# Altium PCB ESP32_GRBL_LASER.PcbDoc
Units mm, origin at the board's own origin, x right, y up, seen from the top; angles counter-clockwise.
Board outline 62.95 x 80 mm, 2 copper layers (Top Layer, Bottom Layer); 43 components, 52 nets, 206 pads, 90 vias.
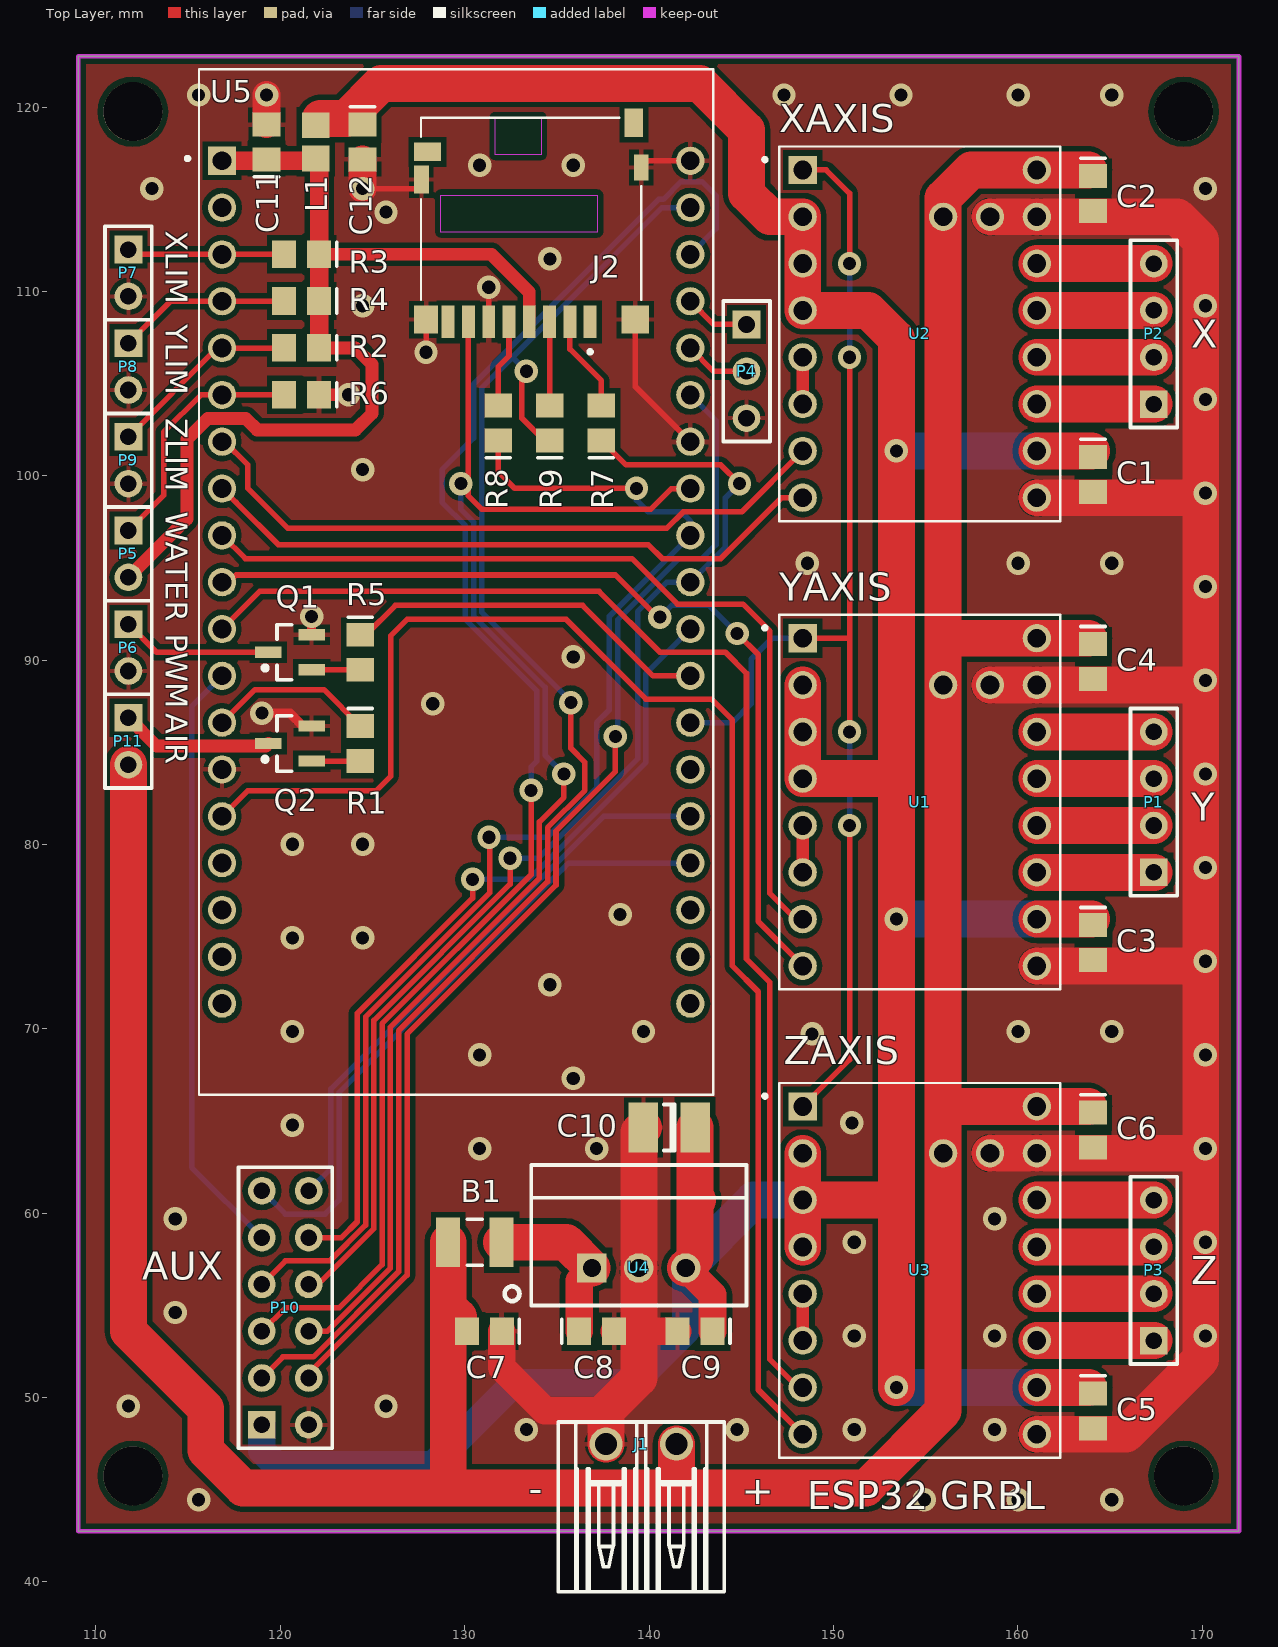
[diagram p0: Top Layer view]
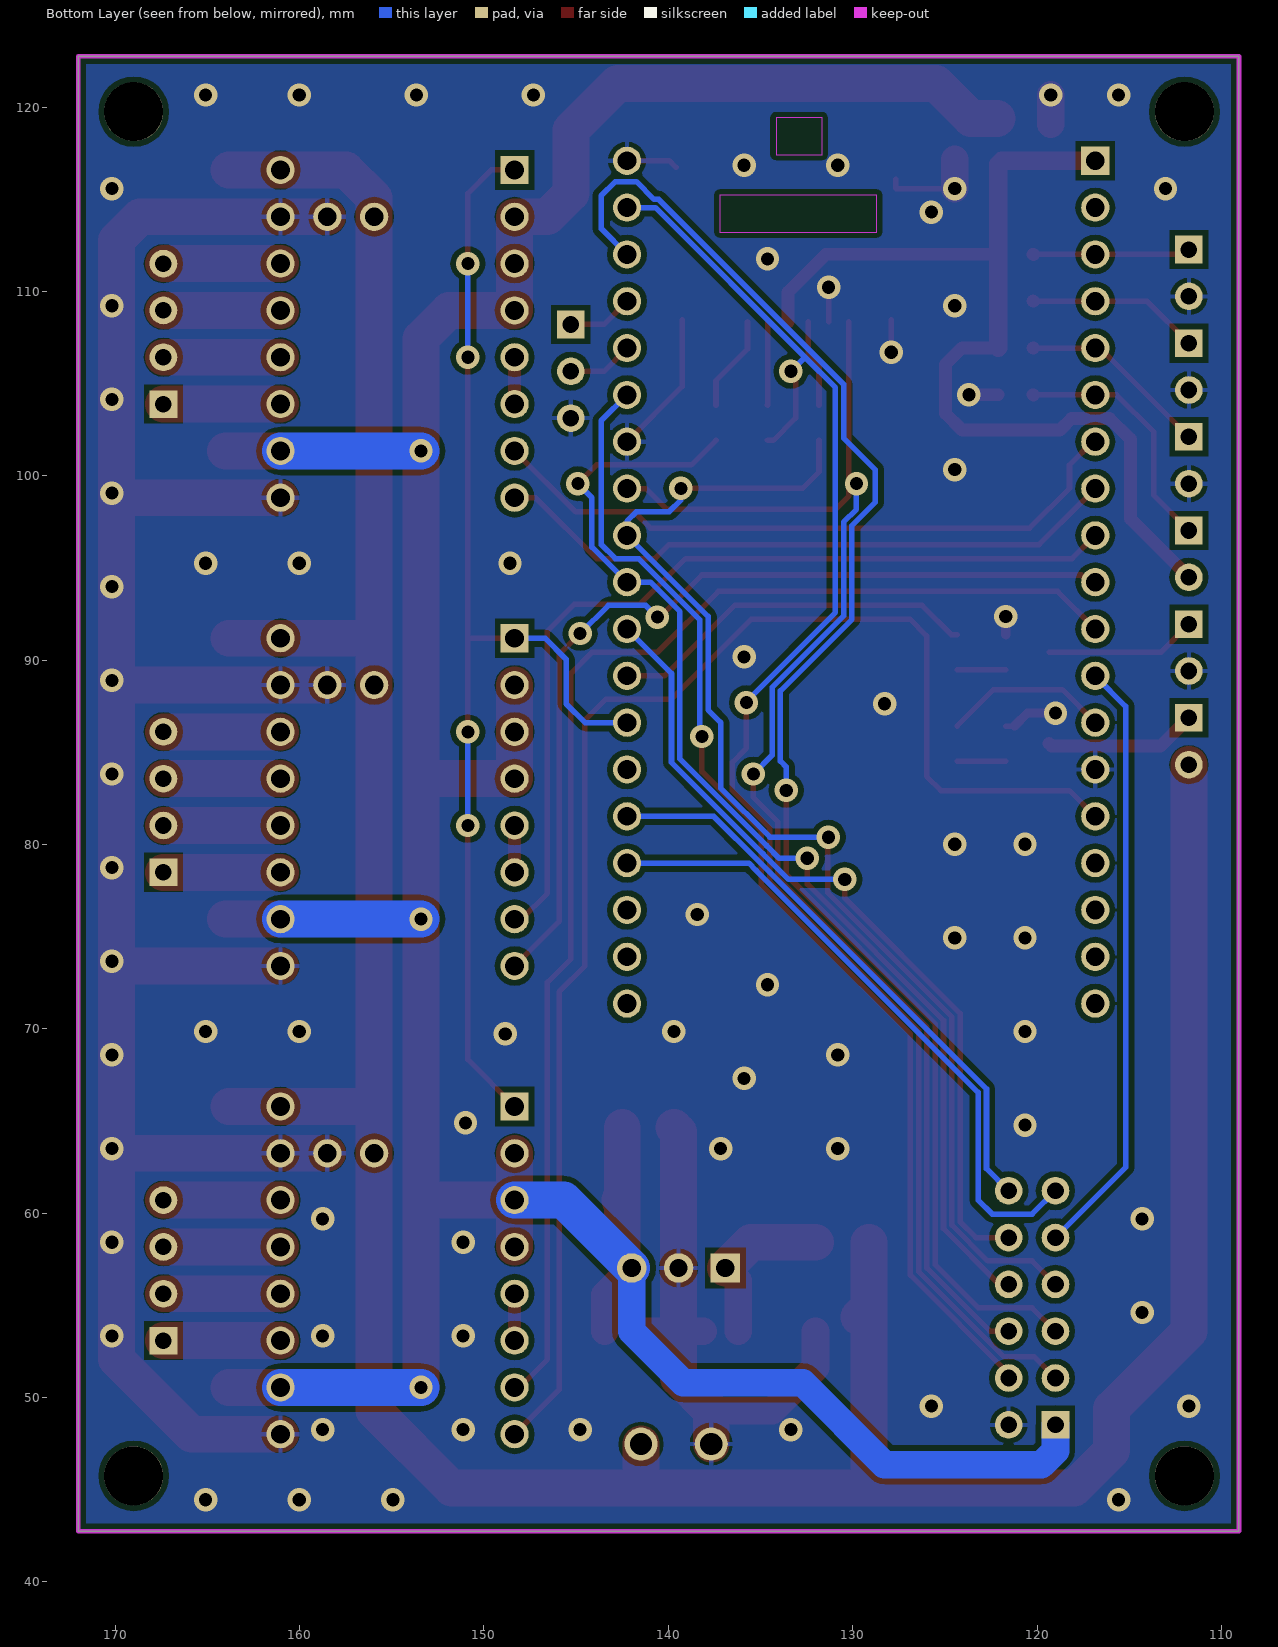
[diagram p1: Bottom Layer view, seen from below]

## Layer stack, top to bottom
Top Solder: solder mask 0.0102, Solder Resist, Dk 3.5
Top Layer: signal copper 0.0356
Dielectric 1: dielectric 0.32, FR-4, Dk 4.8
Bottom Layer: signal copper 0.0356
Bottom Solder: solder mask 0.0102, Solder Resist, Dk 3.5

## Board outline
109.046,42.746 172,42.746 172,122.746 109.046,122.746

## Design rules (kind name [scope] priority, off if disabled: settings)
Clearance Clearance_1 [All vs InPolygon] p1: gap=0.3
Clearance [All] p2: gap=0.15
ComponentClearance [All] p1 off: gap=0.254 collisioncheckmode=3 verticalgap=0.254 showdistances=FALSE
Height [All] p1: minheight=0 maxheight=50 prefheight=12.7
HoleSize [All] p1: absolutevalues=TRUE maxlimit=4.2 minlimit=0.025 maxpercent=80.000 minpercent=20.000
PolygonConnect [ispad] p1: connectstyle=Relief reliefconductorwidth=0.254 reliefentries=4 polygonreliefangle="90 Angle" airgapwidth=0.254
PolygonConnect PolygonConnect_1 [All] p2: connectstyle=Direct reliefconductorwidth=0.254 reliefentries=4 polygonreliefangle="90 Angle" airgapwidth=0.254
RoutingVias [All] p1: holewidth=0.3 width=0.6 viastyle="Through Hole" minholewidth=0.2 minwidth=0.5 maxholewidth=3.81 maxwidth=5.08
SilkToSolderMaskClearance SilkscreenOverComponentPads [IsPad] p1: minsilkscreentomaskgap=0.254 clearancetoexposedcopper=TRUE
SolderMaskExpansion [All] p1: expansion=0.102
UnpouredPolygon [All] p1: allowunpoured=FALSE
Width [All] p1: maxlimit=10 minlimit=0.15 preferedwidth=0.3 minimp=50.000000 maximp=50.000000 favimp=50.000000
25 further rules are at their usual default settings.

## Components (designator, comment, footprint, x,y, rotation, side; value= is the part's Value field where it differs from the comment)
B1 "Ferrite" INDC3225N 130.556,58.42 r180 top
C1 "Cap Semi" 0805 164.084,100.076 r270 top
C2 "Cap Semi" 0805 164.084,115.316 r270 top
C3 "Cap Semi" 0805 164.084,74.676 r270 top
C4 "Cap Semi" 0805 164.084,89.916 r270 top
C5 "Cap Semi" 0805 164.084,49.276 r270 top
C6 "Cap Semi" 0805 164.084,64.516 r270 top
C7 "Cap Semi" 0805 131.064,53.594 r180 top
C8 "Cap Semi" 0805 137.16,53.594 r0 top
C9 "Cap Semi" 0805 142.494,53.594 r180 top
C10 "Cap Semi" 1210 141.097,64.643 r180 top
C11 "Cap Semi" 0805 119.253,118.11 r90 top
C12 "Cap Semi" 0805 124.46,118.11 r270 top
J1 "1037490000" SC_3_81_270G_02 139.573,44.069 r0 top
J2 "1140084168" AMPHENOL_1140084168 133.604,109.22 r0 top
L1 "Ferrite" INDC2012N 121.92,118.11 r90 top
P1 "Y" HDR1X4 167.386,78.486 r90 top
P2 "X" HDR1X4 167.386,103.886 r90 top
P3 "Z" HDR1X4 167.386,53.086 r90 top
P4 "UART" HDR1X3 145.288,108.204 r270 top
P5 "WATER" HDR1X2 111.76,97.028 r270 top
P6 "PWM" HDR1X2 111.76,91.948 r270 top
P7 "XLIM" HDR1X2 111.76,112.268 r270 top
P8 "YLIM" HDR1X2 111.76,107.188 r270 top
P9 "ZLIM" HDR1X2 111.76,102.108 r270 top
P10 "AUX" HDR2X6 118.999,48.514 r90 top
P11 "AIR" HDR1X2 111.76,86.868 r270 top
Q1 "BSS123A" SOT23_M 120.523,90.424 r180 top
Q2 "BSS123A" SOT23_M 120.523,85.471 r180 top
R1 "Res2" 0805 124.333,85.471 r270 top
R2 "Res2" 0805 121.158,106.934 r180 top
R3 "Res2" 0805 121.158,112.014 r180 top
R4 "Res2" 0805 121.158,109.474 r180 top
R5 "Res2" 0805 124.333,90.424 r270 top
R6 "Res2" 0805 121.158,104.394 r180 top
R7 "Res2" 0805 137.414,102.87 r90 top
R8 "Res2" 0805 131.826,102.87 r90 top
R9 "Res2" 0805 134.62,102.87 r90 top
U1 "YAXIS" MODULE_A4988_STEPPER_MOTOR_DRIVER_CARRIER 154.686,82.296 r0 top
U2 "XAXIS" MODULE_A4988_STEPPER_MOTOR_DRIVER_CARRIER 154.686,107.696 r0 top
U3 "ZAXIS" MODULE_A4988_STEPPER_MOTOR_DRIVER_CARRIER 154.686,56.896 r0 top
U4 "3V3REG" TRS1-24xx 139.446,57.023 r0 top
U5 "ESP32-DEVKITC" MODULE_ESP32-DEVKITC 129.54,94.234 r0 top

## Footprints (in the part's own frame and the unit in brackets; to place one, negate y for a bottom-side part, rotate by r counter-clockwise, add the part's x,y. Pads: shape width x height; smd on the part's side, far side on the other; paste and mask are expansions set on the pad)
0805 [mm] "Chip Capacitor; Body 2.0 x 1.2 mm (LxW typ)"
  rect 1.3x1.5 smd: 1(-0.95,0) 2(0.95,0)
  silkscreen extent -1.9,-0.65 -1.9,0.65
1210 [mm] "Chip Capacitor; Body 3.2 x 2.5 mm (LxW typ)"
  rect 1.6x2.7 smd: 1(-1.4,0) 2(1.4,0)
  silkscreen extent -0.3,-1.25 0.3,1.25, body extent -1.37,-1.3 1.42,1.32, height 2.5
AMPHENOL_1140084168 [mm]
  rect 0.7x1.75 smd: 1(3.2,-0.875) 2(2.1,-0.875) 3(1,-0.875) 4(-0.1,-0.875) 5(-1.2,-0.875) 6(-2.3,-0.875) 7(-3.4,-0.875) 8(-4.5,-0.875)
  rect 1x1.55 smd: 9(5.575,9.925)
  rect 1.45x1 smd: 10(-5.625,8.35)
  rect 1.5x1.5 smd: S1(5.65,-0.75)
  rect 1.3x1.5 smd: S2(-5.7,-0.75)
  rect 0.8x1.4 smd: S3(5.975,7.5)
  rect 0.8x1.5 smd: S4(-5.95,6.85)
  Keep-Out Layer region: 3.6,4 -4.9,4 -4.9,6 3.6,6
  Keep-Out Layer region: 0.55,8.2 -1.95,8.2 -1.95,10.2 0.55,10.2
  Keep-Out Layer region: 0.55,8.2 -1.95,8.2 -1.95,10.2 0.55,10.2
  Keep-Out Layer region: 3.6,4 -4.9,4 -4.9,6 3.6,6
  silkscreen extent -5.97,-2.6 5.97,10.2
HDR1X2 [mm] "Connector; Header; 2 Position"
  rect 1.5x1.5 hole 0.9: 1(0,0)
  round 1.5 hole 0.9: 2(2.54,0)
  silkscreen extent -1.27,-1.27 3.81,1.27
HDR1X3 [mm] "Connector; Header; 3 Position"
  rect 1.5x1.5 hole 0.9: 1(0,0)
  round 1.5 hole 0.9: 2(2.54,0) 3(5.08,0)
  silkscreen extent -1.27,-1.27 6.35,1.27
HDR1X4 [mm] "Connector; Header; 4 Position"
  rect 1.5x1.5 hole 0.9: 1(0,0)
  round 1.5 hole 0.9: 2(2.54,0) 3(5.08,0) 4(7.62,0)
  silkscreen extent -1.27,-1.27 8.89,1.27
HDR2X6 [mm] "Connector; Header; 6x2 Position"
  rect 1.5x1.5 hole 0.9: 1(0,0)
  round 1.5 hole 0.9: 2(0,-2.54) 3(2.54,0) 4(2.54,-2.54) 5(5.08,0) 6(5.08,-2.54) 7(7.62,0) 8(7.62,-2.54) 9(10.16,0) 10(10.16,-2.54) 11(12.7,0) 12(12.7,-2.54)
  silkscreen extent -1.27,-3.81 13.97,1.27
INDC2012N [mm] "Chip Inductor, Body 2.0x1.2mm, IPC Medium Density"
  rect 1.4x1.5 smd: 1(0.9,0) 2(-0.9,0)
  body extent -1.1,-0.7 1.1,0.7, height 1.1
INDC3225N [mm] "Chip Inductor, Body 3.2x2.5mm, IPC Medium Density"
  rect 1.3x2.7 smd: 1(1.45,0) 2(-1.45,0)
  silkscreen extent -0.4,-1.25 0.4,1.25, body extent -1.35,-1.7 1.35,1.7, height 1.5
MODULE_A4988_STEPPER_MOTOR_DRIVER_CARRIER [mm]
  rect 1.53x1.53 hole 1.02: 1(-6.35,8.89)
  round 1.53 hole 1.02: 2(-6.35,6.35) 3(-6.35,3.81) 4(-6.35,1.27) 5(-6.35,-1.27) 6(-6.35,-3.81) 7(-6.35,-6.35) 8(-6.35,-8.89) 9(6.35,-8.89) 10(6.35,-6.35) 11(6.35,-3.81) 12(6.35,-1.27) 13(6.35,1.27) 14(6.35,3.81) 15(6.35,6.35) 16(6.35,8.89)
  silkscreen extent -8.5,-10.16 7.62,10.16
MODULE_ESP32-DEVKITC [mm]
  rect 1.53x1.53 hole 1.02: 1(-12.7,22.85)
  round 1.53 hole 1.02: 2(-12.7,20.31) 3(-12.7,17.77) 4(-12.7,15.23) 5(-12.7,12.69) 6(-12.7,10.15) 7(-12.7,7.61) 8(-12.7,5.07) 9(-12.7,2.53) 10(-12.7,-0.01) 11(-12.7,-2.55) 12(-12.7,-5.09) 13(-12.7,-7.63) 14(-12.7,-10.17) 15(-12.7,-12.71) 16(-12.7,-15.25) 17(-12.7,-17.79) 18(-12.7,-20.33) 19(-12.7,-22.87) 20(12.7,-22.87) 21(12.7,-20.33) 22(12.7,-17.79) 23(12.7,-15.25) 24(12.7,-12.71) 25(12.7,-10.17) 26(12.7,-7.63) 27(12.7,-5.09) 28(12.7,-2.55) 29(12.7,-0.01) 30(12.7,2.53) 31(12.7,5.07) 32(12.7,7.61) 33(12.7,10.15) 34(12.7,12.69) 35(12.7,15.23) 36(12.7,17.77) 37(12.7,20.31) 38(12.7,22.85)
  silkscreen extent -14.67,-27.81 13.95,27.81
SC_3_81_270G_02 [mm] "OMNIMATE Signal - Serie BC/SC 3.81  SC 3.81/02/270G 3.2"
  round 1.8 hole 1.2: A1(1.91,3.4) A2(-1.9,3.4)
  silkscreen extent -4.51,-4.6 4.5,4.6, body extent -4.51,-4.6 4.5,4.6, height 7.1
SOT23_M [mm] "SOT23, 3-Leads, Body 2.9x1.3mm, Pitch 0.95mm, Lead Span 2.3mm - Reverse Pinning, IPC Low Density"
  rect 1.45x0.6 smd: 1(1.175,0) 2(-1.175,-0.95) 3(-1.175,0.95)
  silkscreen extent -0.1,-1.5 1.47,1.5, body extent -0.7,-1.5 0.7,1.5, height 1.1
TRS1-24xx [mm] "Switching Regulator,18-32Vin,5Vout 1A"
  rect 1.6x1.6 hole 1: 1(-2.54,0)
  round 1.6 hole 1: 2(0,0) 3(2.54,0)
  silkscreen extent -7.28,-2.03 5.84,5.59, body extent -5.84,-2.03 5.84,5.59, height 10.2

## Part data
B1: library part Inductor, "Inductor"
C1 C2 C3 C4 C5 C6 C7 C8 C9 C10 C11 C12: "Capacitor (Semiconductor SIM Model)"
J1: "OMNIMATE Signal - series BC/SC 3.81"
J2: "10 _8 + 2_ Position Card Connector Secure Digital - microSD™ Surface Mount, Right Angle Gold"
L1: library part "Inductor Iron", "Magnetic-Core Inductor"
P1 P2 P3: library part "Header 4", "Header, 4-Pin"
P4: library part "Header 3", "Header, 3-Pin"
P5 P6 P7 P8 P9 P11: library part "Header 2", "Header, 2-Pin"
P10: library part "Header 6X2", "Header, 6-Pin, Dual row"
Q1 Q2: "N-Channel Enhancement Mode Vertical DMOS FET"
R1 R2 R3 R4 R5 R6 R7 R8 R9: "Resistor"
U1 U2 U3: library part A4988_STEPPER_MOTOR_DRIVER_CARRIER, "Stepper Motor Driver"
U4: library part TSR1-2433, "Switching Regulator,18-32Vin,3.3Vout 1A"
U5: "- Transceiver; 802.11 b/g/n _Wi-Fi, WiFi, WLAN_, Bluetooth® Smart Ready 4.x Dual Mode For Use With ESP-WROOM-32"

## Free pads (board coordinates)
  round 1.53 hole 1.02: 0(158.496,63.246) 0(158.496,88.646) 0(158.496,114.046) 1(155.956,63.246) 1(155.956,88.646) 1(155.956,114.046)
  round 3.2 hole 3.2: 0(169,45.746) 1(112,45.746) 2(112,119.746) 3(169,119.746)

## Via types
v1: diameter 1.27, hole 0.711, Top Layer to Bottom Layer, tented both sides, 90 vias

## Nets (pads, with @x,y where several pads share a name; then routed paths per layer and width w, separated by ;. In a path a pad name is that pad's centre, name@x,y a point inside that pad or via, vN(x,y) a via of type N, cw(c..) or ccw(c..) an arc to the next point about the centre after c; other vN are vias at no path point)
AIR_ASSIST: R1.1 U5.13 | length 9.1
  Top Layer w0.3: U5.13 118.628,88.392 122.362,88.392 R1.1
GND: C1.2 C2.2 C3.2 C4.2 C5.2 C6.2 C7.1 C8.2 C9.2 C10.2 C11.2 C12.2 J1.A2 J2.6 J2.S1 J2.S2 J2.S3 J2.S4 P4.3 P6.2 P7.2 P8.2 P9.2 P10.2 pad.0@158.496,63.246 pad.0@158.496,88.646 pad.0@158.496,114.046 Q1.2 Q2.2 R6.1 U1.9 U1.15 U2.9 U2.15 U3.9 U3.15 U4.2 U5.14 U5.32 U5.38 | length 181
  Top Layer w0.3: Q2.2@121.224,86.421 Q2.2 ; v1(124.46,115.57) 127.635,115.57 127.654,115.589 J2.S4 ; v1(127.904,106.695) J2.S2 ; J2.6 v1(131.304,110.222) ; J2.S1 139.254,104.83 U5.32 ; J2.S3 139.943,117.084 U5.38
  Top Layer w0.5: v1(118.999,87.122) 120.523,87.122 Q2.2@121.224,86.421 ; Q1.2 v1(121.698,92.361)
  Top Layer w0.7: R6.1 v1(123.698,104.394)
  Top Layer w1.5: C11.2 v1(119.253,120.65) ; v1(124.46,115.57) C12.2 ; C7.1 132.014,51.628 134.361,49.281 137.673,49.281 ; C8.2 139.446,53.594 139.573,53.594 ; 139.446,53.721 139.573,53.594 ; C9.2 139.573,53.594
  Top Layer w2: J1.A2 137.673,49.281 139.446,51.054 139.446,53.594 139.446,53.721 U4.2 139.446,64.392 C10.2 ; pad.0@158.496,63.246 U3.15 v1@169.926,63.246 ; pad.0@158.496,88.646 U1.15 v1@169.926,88.646 ; pad.0@158.496,114.046 U2.15 168.656,114.046 169.926,112.776 v1@169.926,98.806 ; U3.9 165.862,48.006 169.926,52.07 v1@169.926,63.246 ; U1.9 v1@169.926,73.406 ; U2.9 v1@169.926,98.806 ; v1@169.926,63.246 v1@169.926,73.406 ; v1@169.926,73.406 v1@169.926,88.646 ; v1@169.926,88.646 v1@169.926,98.806
  Bottom Layer w0.7: v1(123.698,104.394) v1@123.825,104.521
  other v1: 115.57,44.45 154.94,44.45 160.02,44.45 165.1,44.45 133.35,48.26 144.78,48.26 151.13,48.26 158.75,48.26 111.76,49.53 125.73,49.53 151.13,53.34 158.75,53.34 170.18,53.34 114.3,54.61 151.13,58.42 170.18,58.42 114.3,59.69 158.75,59.69 130.81,63.5 137.16,63.5 170.18,63.5 120.65,64.77 151.003,64.897 135.89,67.31 130.81,68.58 170.18,68.58 148.844,69.723 120.65,69.85 139.7,69.85 160.02,69.85 165.1,69.85 134.62,72.39 170.18,73.66 120.65,74.93 124.46,74.93 138.43,76.2 170.18,78.74 120.65,80.01 124.46,80.01 170.18,83.82 128.27,87.63 170.18,88.9 135.89,90.17 170.18,93.98 148.59,95.25 160.02,95.25 165.1,95.25 170.18,99.06 124.46,100.33 170.18,104.14 124.46,109.22 170.18,109.22 134.62,111.76 125.73,114.3 113.03,115.57 170.18,115.57 130.81,116.84 135.89,116.84 115.57,120.65 147.32,120.65 153.67,120.65 160.02,120.65 165.1,120.65
GPIO2: P10.12 U5.24 | length 31.6
  Bottom Layer w0.3: P10.12 122.74,62.415 122.74,66.734 135.047,79.041 135.052,79.041 137.535,81.524 U5.24
GPIO14: P10.9 U5.12 | length 32.7
  Bottom Layer w0.3: U5.12 115.189,87.493 115.189,62.484 P10.9
GPIO15: P10.11 U5.23 | length 35.1
  Bottom Layer w0.3: P10.11 120.269,59.944 122.428,59.944 123.19,60.706 123.19,66.548 135.233,78.591 135.239,78.591 135.632,78.984 U5.23
GPIO17: P10.10 U5.28 | length 44.4
  Top Layer w0.3: P10.10 123.314,58.674 124.173,59.533 124.173,70.833 130.429,77.089 v1(130.429,78.105)
  Bottom Layer w0.3: v1(130.429,78.105) 133.474,78.105 134.86,79.491 134.866,79.491 139.827,84.452 139.827,89.271 U5.28
I2C_SCL: P10.5 U5.36 | length 83.9
  Top Layer w0.3: P10.5 120.269,54.864 123.186,54.864 125.523,57.201 125.523,70.274 133.604,78.355 v1(133.604,82.931)
  Bottom Layer w0.3: v1(133.604,82.931) 133.604,84.201 133.916,84.513 133.916,88.331 130.037,92.21 130.037,97.293 128.778,98.552 128.778,100.33 130.487,102.039 130.487,104.961 140.52,114.994 140.775,114.994 141.732,115.951 142.875,115.951 143.637,115.189 143.637,113.401 U5.36
I2C_SDA: P10.4 U5.33 | length 63.8
  Top Layer w0.3: P10.4 121.539,51.308 126.873,56.642 126.873,69.715 134.954,77.796 134.954,80.725 138.176,83.947 v1(138.176,85.852)
  Bottom Layer w0.3: v1(138.176,85.852) 138.291,85.967 138.291,92.179 141.616,95.504 142.875,95.504 143.637,96.266 143.637,102.987 U5.33
MOT_EN: U1.1 U2.1 U3.1 U5.26 | length 65.6
  Top Layer w0.3: U3.1 150.876,68.326 v1(150.876,81.026) ; U1.1 150.876,91.186 ; U2.1 149.606,116.586 150.876,115.316 v1(150.876,111.506) ; v1(150.876,86.106) 150.876,91.186 ; v1(150.876,106.426) 150.876,91.186
  Bottom Layer w0.3: U5.26 144.516,86.604 145.542,87.63 145.542,90.043 146.685,91.186 U1.1 ; v1(150.876,81.026) v1(150.876,86.106) ; v1(150.876,106.426) v1(150.876,111.506)
NetB1_2: B1.2 C8.1 U4.1 | length 9.2
  Top Layer w1.5: C8.1 136.21,56.327 U4.1
  Top Layer w2: B1.2 135.509,58.42 U4.1
NetJ2_2: J2.2 R7.2 | length 5.2
  Top Layer w0.3: J2.2 135.704,106.866 137.414,105.156 R7.2
NetJ2_3: J2.3 R9.2 | length 4.5
  Top Layer w0.3: J2.3 134.604,103.836 R9.2
NetJ2_5: J2.5 R8.2 | length 4.8
  Top Layer w0.3: R8.2 131.826,105.918 132.404,106.496 J2.5
NetP1_1: P1.1 U1.11 | length 6.3
  Top Layer w2: U1.11 P1.1
NetP1_2: P1.2 U1.12 | length 6.3
  Top Layer w2: U1.12 P1.2
NetP1_3: P1.3 U1.13 | length 6.3
  Top Layer w2: U1.13 P1.3
NetP1_4: P1.4 U1.14 | length 6.3
  Top Layer w2: U1.14 P1.4
NetP2_1: P2.1 U2.11 | length 6.3
  Top Layer w2: U2.11 P2.1
NetP2_2: P2.2 U2.12 | length 6.3
  Top Layer w2: U2.12 P2.2
NetP2_3: P2.3 U2.13 | length 6.3
  Top Layer w2: U2.13 P2.3
NetP2_4: P2.4 U2.14 | length 6.3
  Top Layer w2: U2.14 P2.4
NetP3_1: P3.1 U3.11 | length 6.3
  Top Layer w2: U3.11 P3.1
NetP3_2: P3.2 U3.12 | length 6.3
  Top Layer w2: U3.12 P3.2
NetP3_3: P3.3 U3.13 | length 6.3
  Top Layer w2: U3.13 P3.3
NetP3_4: P3.4 U3.14 | length 6.3
  Top Layer w2: U3.14 P3.4
NetP4_1: P4.1 U5.35 | length 3.6
  Top Layer w0.3: U5.35 143.5,108.204 P4.1
NetP4_2: P4.2 U5.34 | length 3.6
  Top Layer w0.3: U5.34 143.5,105.664 P4.2
NetP5_1: P5.1 R6.2 U5.6 | length 13.5
  Top Layer w0.3: P5.1 113.665,98.933 113.665,102.362 115.687,104.384 U5.6 R6.2@120.198,104.384
  Top Layer w0.7: R6.2@120.198,104.384 R6.2
NetP6_1: P6.1 Q1.1 | length 8.2
  Top Layer w0.3: P6.1 113.284,90.424 Q1.1
NetP11_1: P11.1 Q2.1 | length 8.3
  Top Layer w0.7: P11.1 113.289,85.339 119.216,85.339 Q2.1
NetQ1_3: Q1.3 R5.2 | length 2.6
  Top Layer w0.3: Q1.3 R5.2
NetQ2_3: Q2.3 R1.2 | length 2.6
  Top Layer w0.3: Q2.3 R1.2
NetU1_5: U1.5 U1.6 | length 2.5
  Top Layer w0.7: U1.6 U1.5
NetU2_5: U2.5 U2.6 | length 2.5
  Top Layer w0.7: U2.6 U2.5
NetU3_5: U3.5 U3.6 | length 2.5
  Top Layer w0.7: U3.6 U3.5
PWM_LASER: R5.1 U5.27 | length 20.2
  Top Layer w0.3: R5.1 124.648,91.374 126.238,92.964 136.398,92.964 140.218,89.144 U5.27 U5.27@142.23,89.154
SD_CLK: P10.7 R8.1 U5.30 | length 67.9
  Top Layer w0.3: P10.7 120.269,57.404 122.681,57.404 124.623,59.346 124.623,70.647 131.364,77.388 v1@131.364,80.391 ; R8.1 131.826,100.203 132.715,99.314 v1(139.319,99.314)
  Bottom Layer w0.3: v1(131.318,80.391) 134.493,80.391 137.16,83.058 137.16,86.614 137.841,87.295 137.841,92.365 U5.30 142.24,97.536 141.732,98.044 139.954,98.044 139.319,98.679 v1(139.319,99.314)
SD_MISO: J2.7 P10.6 U5.31 | length 77.5
  Top Layer w0.3: P10.6 122.552,53.594 125.973,57.015 125.973,70.087 134.054,78.168 134.054,81.222 135.382,82.55 v1(135.382,83.82) v1@135.382,83.566 ; v1(129.794,99.568) v1@130.204,99.568 ; J2.7 v1@130.204,99.568 ; U5.31 141.214,99.304 140.081,98.171 130.937,98.171 130.204,98.904 v1@130.204,99.568
  Bottom Layer w0.3: v1(129.794,99.568) 129.794,98.172 130.487,97.479 130.487,92.397 134.366,88.518 134.366,84.836 v1(135.382,83.82)
SD_MOSI: P10.3 R9.1 U5.37 | length 85.4
  Top Layer w0.3: P10.3 120.142,52.197 121.792,52.197 126.423,56.828 126.423,69.901 134.504,77.982 134.504,80.911 136.525,82.932 136.525,84.455 135.763,85.217 v1(135.763,87.694) ; v1(133.35,105.664) 133.096,105.41 133.096,103.124 134.3,101.92 R9.1
  Bottom Layer w0.3: v1(133.35,105.664) 132.588,106.426 ; v1(135.763,87.694) 135.763,87.757 130.937,92.583 130.937,104.775 132.588,106.426 ; U5.37 140.706,114.544 132.588,106.426
SD_SS: P10.8 R7.1 U5.29 | length 63.5
  Top Layer w0.3: P10.8 122.047,56.134 125.073,59.16 125.073,70.46 132.461,77.848 v1(132.461,79.248) ; R7.1 138.75,100.584 143.891,100.584 v1(144.907,99.568)
  Bottom Layer w0.3: v1(132.461,79.248) 133.981,79.248 134.674,79.941 134.679,79.941 139.377,84.639 139.377,92.628 140.973,94.224 U5.29 144.145,96.129 144.145,98.806 v1(144.907,99.568)
VCC: C1.1 C3.1 C5.1 C9.1 C10.1 C12.1 L1.1 P10.1 U1.2 U1.3 U1.4 U1.10 U2.2 U2.3 U2.4 U2.10 U3.2 U3.3 U3.4 U3.10 U4.3 | length 202.6
  Top Layer w1.5: U4.3 143.444,55.565 C9.1
  Top Layer w2: L1.1@122.174,119.38 123.571,119.38 125.476,121.285 142.748,121.285 145.288,118.745 145.288,115.316 146.558,114.046 U2.2 U2.3 U2.4 151.892,108.966 153.416,107.442 v1(153.416,101.346) 153.416,83.566 ; U4.3 142.497,57.534 142.497,60.579 ; C10.1 142.497,60.579 ; 142.624,60.706 142.497,60.579 ; U3.4 U3.3 ; U3.2 U3.3 ; U1.2 U1.3 U1.4 153.416,83.566 ; v1(153.416,50.546) 153.416,60.706 ; U3.10 C5.1@163.83,50.546 ; U1.10 C3.1@164.018,75.946 ; U2.10 C1.1@164.018,101.346 ; U3.3 153.416,60.706 ; 153.416,60.706 v1(153.416,75.946) 153.416,83.566
  Bottom Layer w1.5: P10.1 118.999,47.117 119.761,46.355 128.27,46.355 132.715,50.8 139.192,50.8 141.986,53.594 U4.3
  Bottom Layer w2: U4.3 145.669,60.706 U3.3 ; v1(153.416,50.546) U3.10 ; v1(153.416,75.946) U1.10 ; v1(153.416,101.346) U2.10
VCC_ESP: C11.1 J2.4 L1.2 P5.2 R2.1 R3.1 R4.1 U5.1 | length 54.7
  Top Layer w0.7: P5.2 114.935,97.663 114.935,101.981 116.063,103.109 118.125,103.109 118.745,102.489 124.079,102.489 124.968,103.378 124.968,106.045 124.079,106.934 R2.1 ; R3.1 131.445,112.014 133.504,109.955 J2.4
  Top Layer w1: U5.1 L1.2@121.92,117.084 ; R2.1 R4.1 R3.1 L1.2@122.108,116.896
VMOT: B1.1 C2.1 C4.1 C6.1 C7.2 J1.A1 P11.2 pad.1@155.956,63.246 pad.1@155.956,88.646 pad.1@155.956,114.046 U1.16 U2.16 U3.16 | length 188.2
  Top Layer w2: P11.2 111.76,53.594 115.951,49.403 115.951,47.117 117.983,45.085 141.478,45.085 ; B1.1 129.106,54.917 ; 129.413,45.085 129.106,45.392 129.106,54.917 ; 129.667,54.356 129.106,54.917 ; J1.A1 141.483,45.09 141.478,45.085 ; C6.1@163.83,65.786 U3.16 155.956,65.786 ; C4.1@163.83,91.186 U1.16 155.956,91.186 ; C2.1@163.83,116.586 U2.16 157.48,116.586 155.956,115.062 155.956,91.186 ; 141.478,45.085 151.765,45.085 155.956,49.276 155.956,65.786 ; 155.956,65.786 155.956,91.186
XDIR: U2.8 U5.8 | length 34.7
  Top Layer w0.3: U5.8 117.592,98.552 117.602,98.552 119.888,96.266 139.954,96.266 140.716,95.504 143.891,95.504 147.193,98.806 U2.8
  Top Layer w0.7: U2.8@148.082,98.806 U2.8
XLIM: P7.1 R3.2 U5.3 | length 8.6
  Top Layer w0.3: P7.1@112.024,112.004 U5.3 R3.2@120.198,112.004
  Top Layer w0.7: P7.1 P7.1@112.024,112.004 ; R3.2@120.198,112.004 R3.2
XSTEP: U2.7 U5.7 | length 36.2
  Top Layer w0.3: U5.7 116.977,101.844 118.237,100.584 118.237,99.314 120.396,97.155 140.97,97.155 141.859,98.044 145.034,98.044 U2.7
  Top Layer w0.7: U2.7@148.082,101.346 U2.7
YDIR: U1.8 U5.10 | length 50.4
  Top Layer w0.3: U5.10 117.211,94.224 117.602,94.615 138.176,94.615 140.462,92.329 v1(140.589,92.329) ; v1(144.78,91.44) 145.923,90.297 145.923,75.819 148.209,73.533 U1.8
  Top Layer w0.7: U1.8 148.082,73.406 148.209,73.533 U1.8@148.336,73.66
  Bottom Layer w0.3: v1(140.589,92.329) 140.589,92.71 140.779,92.519 141.224,92.964 143.256,92.964 v1(144.78,91.44)
YLIM: P8.1 R4.2 U5.4 | length 9.4
  Top Layer w0.3: P8.1 114.036,109.464 U5.4 R4.2@120.198,109.464
  Top Layer w0.7: R4.2@120.198,109.464 R4.2
YSTEP: U1.7 U5.9 | length 48.5
  Top Layer w0.3: U5.9 118.1,95.504 139.065,95.504 141.537,93.032 145.093,93.032 146.558,91.567 146.558,77.343 147.955,75.946 U1.7
ZDIR: U3.8 U5.15 | length 79.1
  Top Layer w0.3: U5.15 118.237,82.921 125.212,82.921 125.984,83.693 125.984,91.313 126.873,92.202 135.509,92.202 139.827,87.884 143.383,87.884 144.526,86.741 144.526,73.406 145.923,72.009 145.923,50.419 U3.8
ZLIM: P9.1 R2.2 U5.5 | length 10.4
  Top Layer w0.3: P9.1 U5.5@116.576,106.924 ; U5.5 R2.2@120.198,106.924
  Top Layer w0.7: U5.5@116.576,106.924 U5.5 ; R2.2@120.198,106.924 R2.2
ZSTEP: U3.7 U5.11 | length 71.3
  Top Layer w0.3: U5.11 118.882,93.726 137.287,93.726 140.589,90.424 144.145,90.424 145.288,89.281 145.288,73.787 146.558,72.517 146.558,52.07 148.082,50.546 U3.7
pads on no net: J2.1 J2.8 J2.9 J2.10 U5.2 U5.16 U5.17 U5.18 U5.19 U5.20 U5.21 U5.22 U5.25

## Polygon pours and split planes (outlines as drawn)
GND on Bottom Layer "Top Layer-No Net" (solid, remove dead copper, pour order 2): 108.077,125.095 171.704,125.095 173.609,123.19 173.609,41.783 172.085,40.259 108.458,40.259 106.426,42.291 107.061,42.926 107.061,123.063
GND on Top Layer "Top Layer-No Net" (solid, remove dead copper, pour order 3): 108.077,125.349 171.831,125.349 174.625,122.555 174.625,43.815 171.45,40.64 108.839,40.64 105.029,44.45 106.553,45.974 106.553,123.19

## Keep-outs
Keep-Out Layer:
  the board outline again, w0.254

## Silkscreen, mask and mechanical layers (free items; w line width, h text height)
Top Overlay:
  text "-" at 133.477,44.323 h1.52
  text "+" at 145.034,44.196 h1.52
  text "ESP32 GRBL" at 148.59,43.942 h1.52